# EAGLE board SparkFun_Pi_AVR_Programmer_HAT-Panel_v22 (EAGLE 7.7.0), part 1 of 2
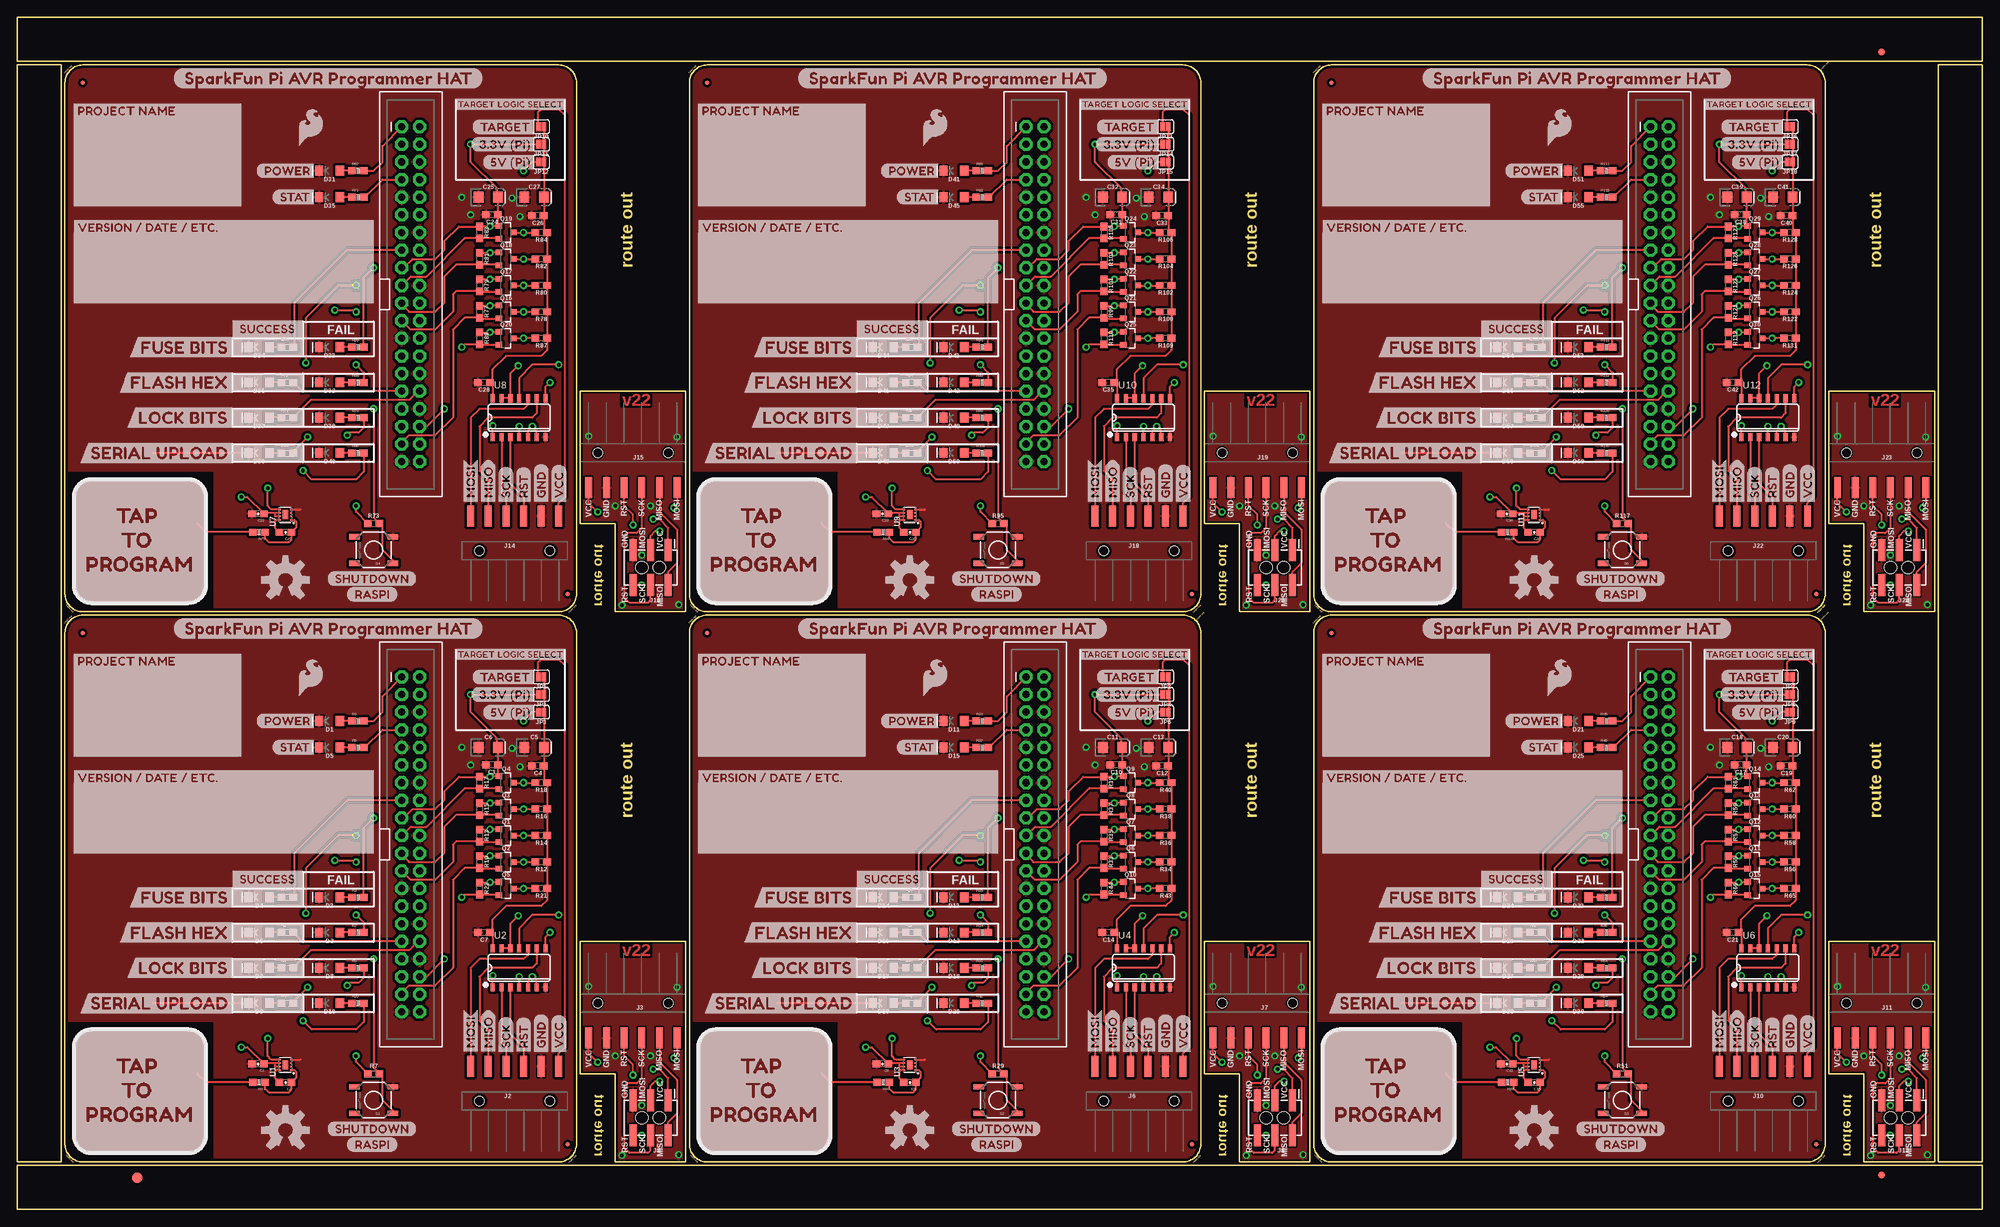
[diagram p0: board, top side]
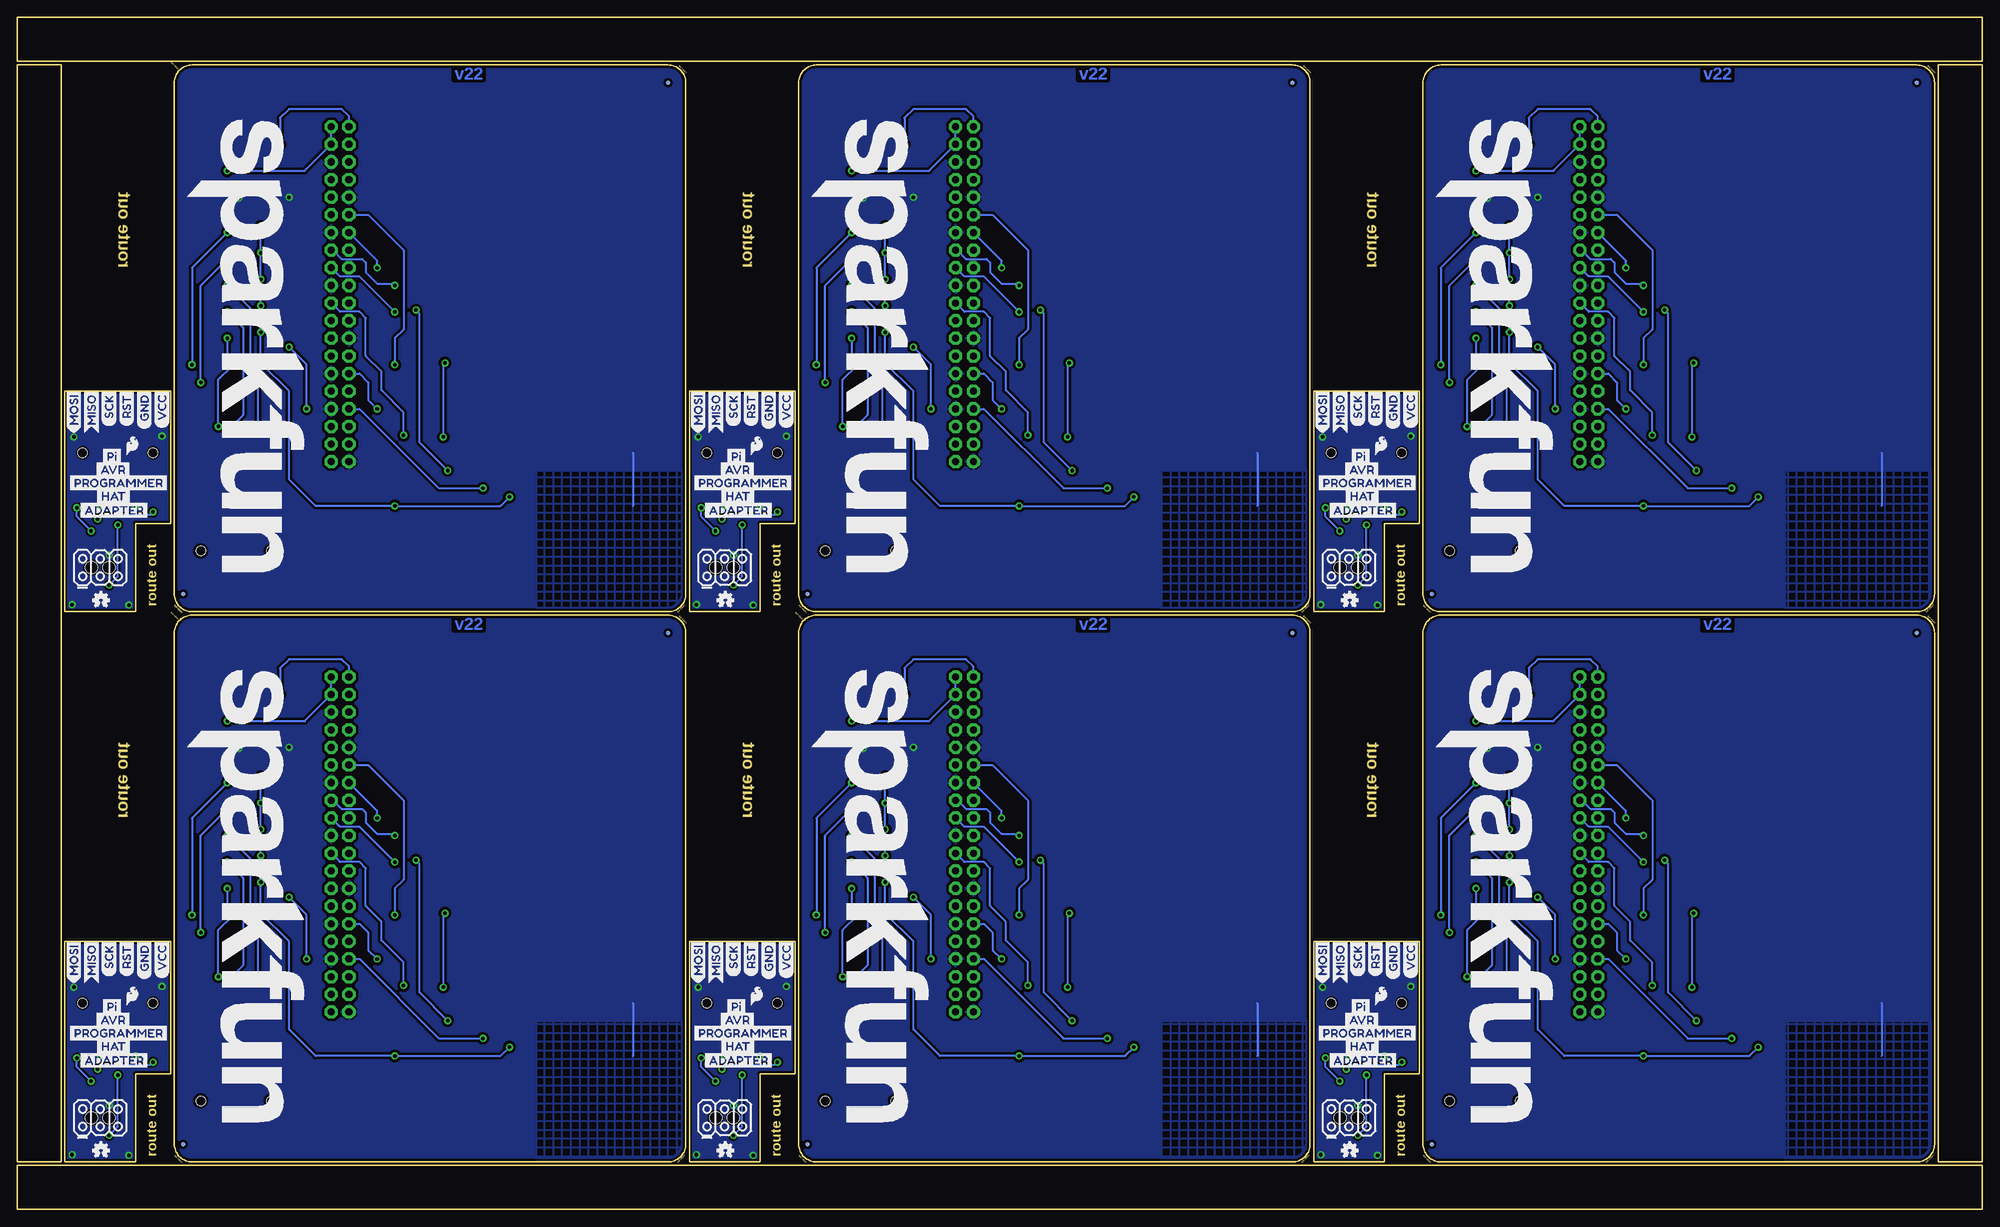
[diagram p1: board, bottom side, seen from below]

Size 282.96 x 171.7 mm. Coordinates in mm from the lower left corner, seen from the top.
Outline: 6.35,79.25 6.35,6.86 0,6.86 0,29.72
Outline: 0,27.18 0,164.85 6.35,164.85 6.35,76.71
Outline: 72.39,0 0,0 0,6.35 22.86,6.35
Outline: 20.32,6.35 282.96,6.35 282.96,0 69.85,0
Outline: 276.61,59.69 276.61,164.85 282.96,164.85 282.96,109.22
Outline: 282.96,111.76 282.96,6.86 276.61,6.86 276.61,62.23
Outline: 210.57,171.7 282.96,171.7 282.96,165.35 260.1,165.35
Outline: 262.64,165.35 0,165.35 0,171.7 213.11,171.7
Outline: 80.52,83.06 arc90 77.98,85.6 9.4,85.6 arc90 6.86,83.06 6.86,9.4 arc90 9.4,6.86 77.98,6.86 arc90 80.52,9.4 80.52,83.06
Outline: 86.11,6.86 96.27,6.86 96.27,38.61 81.03,38.61 81.03,19.56 86.11,19.56 86.11,6.86
Outline: 170.43,83.06 arc90 167.89,85.6 99.31,85.6 arc90 96.77,83.06 96.77,9.4 arc90 99.31,6.86 167.89,6.86 arc90 170.43,9.4 170.43,83.06
Outline: 176.02,6.86 186.18,6.86 186.18,38.61 170.94,38.61 170.94,19.56 176.02,19.56 176.02,6.86
Outline: 260.35,83.06 arc90 257.81,85.6 189.23,85.6 arc90 186.69,83.06 186.69,9.4 arc90 189.23,6.86 257.81,6.86 arc90 260.35,9.4 260.35,83.06
Outline: 265.94,6.86 276.1,6.86 276.1,38.61 260.86,38.61 260.86,19.56 265.94,19.56 265.94,6.86
Outline: 80.52,162.31 arc90 77.98,164.85 9.4,164.85 arc90 6.86,162.31 6.86,88.65 arc90 9.4,86.11 77.98,86.11 arc90 80.52,88.65 80.52,162.31
Outline: 86.11,86.11 96.27,86.11 96.27,117.86 81.03,117.86 81.03,98.81 86.11,98.81 86.11,86.11
Outline: 170.43,162.31 arc90 167.89,164.85 99.31,164.85 arc90 96.77,162.31 96.77,88.65 arc90 99.31,86.11 167.89,86.11 arc90 170.43,88.65 170.43,162.31
Outline: 176.02,86.11 186.18,86.11 186.18,117.86 170.94,117.86 170.94,98.81 176.02,98.81 176.02,86.11
Outline: 260.35,162.31 arc90 257.81,164.85 189.23,164.85 arc90 186.69,162.31 186.69,88.65 arc90 189.23,86.11 257.81,86.11 arc90 260.35,88.65 260.35,162.31
Outline: 265.94,86.11 276.1,86.11 276.1,117.86 260.86,117.86 260.86,98.81 265.94,98.81 265.94,86.11
Copper layers (1*16): Top 0.035mm / dielectric 1.5mm / Bottom 0.035mm
Design rules "SparkFun-2-layer *": minimum track width 10mil, minimum drill 20mil, track to track 8mil, track to pad 8mil, pad to pad 8mil, via to via 8mil, smd to smd 8mil, copper to edge 8mil, drill to drill 8mil, minimum pad ring 12mil, minimum via ring 10mil, stop-mask expansion 4mil, vias tented up to drill 20mil, thermal gap 10mil
Net classes: 3 VCC: width 0.381 mm, drill 0.508 mm, clearance 0.254 mm to class 0

## Footprints (pad centres in the part's own frame; a part is rotated, then mirrored left to right if it is on the bottom)
0603-CAP = smd 1.1 x 1: 1 -0.85,0; 2 0.85,0
0603 = smd 1.1 x 1: 1 -0.85,0; 2 0.85,0
EIA3216 = smd 1.4 x 1.6: + 1.4,0; - -1.4,0
LED-1206 = smd 1.2 x 1.4: A -1.5,0; C 1.5,0
FIDUCIAL-1.5X3 = smd 1.5 x 1.5: 1 0,0
FIDUCIAL-1X2 = smd 1 x 1: 1 0,0
FIDUCIAL-MICRO = smd 0.635 x 0.635: 1 0,0
2X20-SHROUDED = drill 1.016 pad 1.88 octagon: 1 -1.27,24.13; 2 1.27,24.13; 3 -1.27,21.59; 4 1.27,21.59; 5 -1.27,19.05; 6 1.27,19.05; 7 -1.27,16.51; 8 1.27,16.51; 9 -1.27,13.97; 10 1.27,13.97; 11 -1.27,11.43; 12 1.27,11.43; 13 -1.27,8.89; 14 1.27,8.89; 15 -1.27,6.35; 16 1.27,6.35; 17 -1.27,3.81; 18 1.27,3.81; 19 -1.27,1.27; 20 1.27,1.27; 21 -1.27,-1.27; 22 1.27,-1.27; 23 -1.27,-3.81; 24 1.27,-3.81; 25 -1.27,-6.35; 26 1.27,-6.35; 27 -1.27,-8.89; 28 1.27,-8.89; 29 -1.27,-11.43; 30 1.27,-11.43; 31 -1.27,-13.97; 32 1.27,-13.97; 33 -1.27,-16.51; 34 1.27,-16.51; 35 -1.27,-19.05; 36 1.27,-19.05; 37 -1.27,-21.59; 38 1.27,-21.59; 39 -1.27,-24.13; 40 1.27,-24.13
1X06-SMD_RA_MALE = smd 1 x 3: 1 -6.35,5; 2 -3.81,5; 3 -1.27,5; 4 1.27,5; 5 3.81,5; 6 6.35,5 | hole 1.4: -5.08,0; 5.08,0
2X3_SMT_POSTS = smd 1 x 3.17: 1 -2.54,-2.54; 2 -2.54,2.54; 3 0,-2.54; 4 0,2.54; 5 2.54,-2.54; 6 2.54,2.54 | hole 1.8: -1.27,0; 1.27,0
SMT-JUMPER_2_NO_SILK = smd 0.635 x 1.27: 1 -0.406,0; 2 0.406,0
SMT-JUMPER_2_NC_PASTE_SILK = smd 0.635 x 1.27: 1 -0.406,0; 2 0.406,0
SOT23-3 = smd 0.8 x 0.9: 1 -0.95,-1; 2 0.95,-1; 3 0,1.1
0603-RES = smd 1.1 x 1: 1 -0.85,0; 2 0.85,0
TACTILE-SWITCH-SMD = smd 1.524 x 0.762: 1 -2.794,1.905; 2 2.794,1.905; 3 -2.794,-1.905; 4 2.794,-1.905
UDFN/USON_8_PAD = smd 0.25 x 0.3: 1 -0.75,-0.852; 2 -0.25,-0.852; 3 0.25,-0.852; 4 0.75,-0.852; 5 0.75,0.852; 6 0.25,0.852; 7 -0.25,0.852; 8 -0.75,0.852 | smd 1.3 x 0.8: P$1 0,0
SO14 = smd 0.6 x 1.2: 1 -3.175,-2.8; 2 -1.905,-2.8; 3 -0.635,-2.8; 4 0.635,-2.8; 5 1.905,-2.8; 6 3.175,-2.8; 7 4.445,-2.8; 8 4.445,2.8; 9 3.175,2.8; 10 1.905,2.8; 11 0.635,2.8; 12 -0.635,2.8; 13 -1.905,2.8; 14 -3.175,2.8

## Placement (x,y rotation side)
C1  0.1uF  [0603-CAP]  34.67,20.95 180 top
C2  10nF  [0603-CAP]  38.61,18.29 180 top
C3  0.1uF  [0603]  68.33,64.01 180 top
C4  0.1uF  [0603]  74.93,63.88 180 top
C5  10uF  [EIA3216]  74.42,66.55 0 top
C6  10uF  [EIA3216]  67.82,66.55 0 top
C7  0.1uF  [0603]  67.18,39.88 180 top
C8  0.1uF  [0603-CAP]  124.59,20.95 180 top
C9  10nF  [0603-CAP]  128.52,18.29 180 top
C10  0.1uF  [0603]  158.24,64.01 180 top
C11  10uF  [EIA3216]  157.73,66.55 0 top
C12  0.1uF  [0603]  164.85,63.88 180 top
C13  10uF  [EIA3216]  164.34,66.55 0 top
C14  0.1uF  [0603]  157.1,39.88 180 top
C15  0.1uF  [0603-CAP]  214.5,20.95 180 top
C16  10nF  [0603-CAP]  218.44,18.29 180 top
C17  0.1uF  [0603]  248.16,64.01 180 top
C18  10uF  [EIA3216]  247.65,66.55 0 top
C19  0.1uF  [0603]  254.76,63.88 180 top
C20  10uF  [EIA3216]  254.25,66.55 0 top
C21  0.1uF  [0603]  247.01,39.88 180 top
C22  0.1uF  [0603-CAP]  34.67,100.2 180 top
C23  10nF  [0603-CAP]  38.61,97.54 180 top
C24  0.1uF  [0603]  68.33,143.26 180 top
C25  10uF  [EIA3216]  67.82,145.8 0 top
C26  0.1uF  [0603]  74.93,143.13 180 top
C27  10uF  [EIA3216]  74.42,145.8 0 top
C28  0.1uF  [0603]  67.18,119.13 180 top
C29  0.1uF  [0603-CAP]  124.59,100.2 180 top
C30  10nF  [0603-CAP]  128.52,97.54 180 top
C31  0.1uF  [0603]  158.24,143.26 180 top
C32  10uF  [EIA3216]  157.73,145.8 0 top
C33  0.1uF  [0603]  164.85,143.13 180 top
C34  10uF  [EIA3216]  164.34,145.8 0 top
C35  0.1uF  [0603]  157.1,119.13 180 top
C36  0.1uF  [0603-CAP]  214.5,100.2 180 top
C37  10nF  [0603-CAP]  218.44,97.54 180 top
C38  0.1uF  [0603]  248.16,143.26 180 top
C39  10uF  [EIA3216]  247.65,145.8 0 top
C40  0.1uF  [0603]  254.76,143.13 180 top
C41  10uF  [EIA3216]  254.25,145.8 0 top
C42  0.1uF  [0603]  247.01,119.13 180 top
D1  GREEN  [LED-1206]  44.96,70.36 180 top
D2  RED  [LED-1206]  44.96,39.88 180 top
D3  RED  [LED-1206]  44.96,44.96 180 top
D4  GREEN  [LED-1206]  34.8,44.96 180 top
D5  GREEN  [LED-1206]  44.96,66.55 180 top
D6  GREEN  [LED-1206]  34.8,39.88 180 top
D7  GREEN  [LED-1206]  34.8,34.8 180 top
D8  RED  [LED-1206]  44.96,34.8 180 top
D9  GREEN  [LED-1206]  34.8,29.72 180 top
D10  RED  [LED-1206]  44.96,29.72 180 top
D11  GREEN  [LED-1206]  134.87,70.36 180 top
D12  RED  [LED-1206]  134.87,39.88 180 top
D13  RED  [LED-1206]  134.87,44.96 180 top
D14  GREEN  [LED-1206]  124.71,44.96 180 top
D15  GREEN  [LED-1206]  134.87,66.55 180 top
D16  GREEN  [LED-1206]  124.71,39.88 180 top
D17  GREEN  [LED-1206]  124.71,34.8 180 top
D18  RED  [LED-1206]  134.87,34.8 180 top
D19  GREEN  [LED-1206]  124.71,29.72 180 top
D20  RED  [LED-1206]  134.87,29.72 180 top
D21  GREEN  [LED-1206]  224.79,70.36 180 top
D22  RED  [LED-1206]  224.79,39.88 180 top
D23  RED  [LED-1206]  224.79,44.96 180 top
D24  GREEN  [LED-1206]  214.63,44.96 180 top
D25  GREEN  [LED-1206]  224.79,66.55 180 top
D26  GREEN  [LED-1206]  214.63,39.88 180 top
D27  GREEN  [LED-1206]  214.63,34.8 180 top
D28  RED  [LED-1206]  224.79,34.8 180 top
D29  GREEN  [LED-1206]  214.63,29.72 180 top
D30  RED  [LED-1206]  224.79,29.72 180 top
D31  GREEN  [LED-1206]  44.96,149.61 180 top
D32  RED  [LED-1206]  44.96,119.13 180 top
D33  RED  [LED-1206]  44.96,124.21 180 top
D34  GREEN  [LED-1206]  34.8,124.21 180 top
D35  GREEN  [LED-1206]  44.96,145.8 180 top
D36  GREEN  [LED-1206]  34.8,119.13 180 top
D37  GREEN  [LED-1206]  34.8,114.05 180 top
D38  RED  [LED-1206]  44.96,114.05 180 top
D39  GREEN  [LED-1206]  34.8,108.97 180 top
D40  RED  [LED-1206]  44.96,108.97 180 top
D41  GREEN  [LED-1206]  134.87,149.61 180 top
D42  RED  [LED-1206]  134.87,119.13 180 top
D43  RED  [LED-1206]  134.87,124.21 180 top
D44  GREEN  [LED-1206]  124.71,124.21 180 top
D45  GREEN  [LED-1206]  134.87,145.8 180 top
D46  GREEN  [LED-1206]  124.71,119.13 180 top
D47  GREEN  [LED-1206]  124.71,114.05 180 top
D48  RED  [LED-1206]  134.87,114.05 180 top
D49  GREEN  [LED-1206]  124.71,108.97 180 top
D50  RED  [LED-1206]  134.87,108.97 180 top
D51  GREEN  [LED-1206]  224.79,149.61 180 top
D52  RED  [LED-1206]  224.79,119.13 180 top
D53  RED  [LED-1206]  224.79,124.21 180 top
D54  GREEN  [LED-1206]  214.63,124.21 180 top
D55  GREEN  [LED-1206]  224.79,145.8 180 top
D56  GREEN  [LED-1206]  214.63,119.13 180 top
D57  GREEN  [LED-1206]  214.63,114.05 180 top
D58  RED  [LED-1206]  224.79,114.05 180 top
D59  GREEN  [LED-1206]  214.63,108.97 180 top
D60  RED  [LED-1206]  224.79,108.97 180 top
E$1  [FIDUCIAL-1.5X3]  17.27,4.57 0 top
E$5  [FIDUCIAL-1X2]  268.48,166.75 270 top
E$6  [FIDUCIAL-1X2]  268.48,4.95 90 top
FD1  FIDUCIALUFIDUCIAL  [FIDUCIAL-MICRO]  9.4,83.06 0 top
FD2  FIDUCIALUFIDUCIAL  [FIDUCIAL-MICRO]  79.25,9.4 0 top
FD3  FIDUCIALUFIDUCIAL  [FIDUCIAL-MICRO]  79.25,9.4 0 bottom
FD4  FIDUCIALUFIDUCIAL  [FIDUCIAL-MICRO]  9.4,83.06 0 bottom
FD5  FIDUCIALUFIDUCIAL  [FIDUCIAL-MICRO]  99.31,83.06 0 top
FD6  FIDUCIALUFIDUCIAL  [FIDUCIAL-MICRO]  169.16,9.4 0 top
FD7  FIDUCIALUFIDUCIAL  [FIDUCIAL-MICRO]  169.16,9.4 0 bottom
FD8  FIDUCIALUFIDUCIAL  [FIDUCIAL-MICRO]  99.31,83.06 0 bottom
FD9  FIDUCIALUFIDUCIAL  [FIDUCIAL-MICRO]  189.23,83.06 0 top
FD10  FIDUCIALUFIDUCIAL  [FIDUCIAL-MICRO]  259.08,9.4 0 top
FD11  FIDUCIALUFIDUCIAL  [FIDUCIAL-MICRO]  259.08,9.4 0 bottom
FD12  FIDUCIALUFIDUCIAL  [FIDUCIAL-MICRO]  189.23,83.06 0 bottom
FD13  FIDUCIALUFIDUCIAL  [FIDUCIAL-MICRO]  9.4,162.31 0 top
FD14  FIDUCIALUFIDUCIAL  [FIDUCIAL-MICRO]  79.25,88.65 0 top
FD15  FIDUCIALUFIDUCIAL  [FIDUCIAL-MICRO]  79.25,88.65 0 bottom
FD16  FIDUCIALUFIDUCIAL  [FIDUCIAL-MICRO]  9.4,162.31 0 bottom
FD17  FIDUCIALUFIDUCIAL  [FIDUCIAL-MICRO]  99.31,162.31 0 top
FD18  FIDUCIALUFIDUCIAL  [FIDUCIAL-MICRO]  169.16,88.65 0 top
FD19  FIDUCIALUFIDUCIAL  [FIDUCIAL-MICRO]  169.16,88.65 0 bottom
FD20  FIDUCIALUFIDUCIAL  [FIDUCIAL-MICRO]  99.31,162.31 0 bottom
FD21  FIDUCIALUFIDUCIAL  [FIDUCIAL-MICRO]  189.23,162.31 0 top
FD22  FIDUCIALUFIDUCIAL  [FIDUCIAL-MICRO]  259.08,88.65 0 top
FD23  FIDUCIALUFIDUCIAL  [FIDUCIAL-MICRO]  259.08,88.65 0 bottom
FD24  FIDUCIALUFIDUCIAL  [FIDUCIAL-MICRO]  189.23,162.31 0 bottom
J1  RASPBERRYPI-B+-GPIO  [2X20-SHROUDED]  56.64,52.58 0 top
J2  SPI  [1X06-SMD_RA_MALE]  71.63,15.62 0 top
J3  CABLE  [1X06-SMD_RA_MALE]  88.65,29.72 180 top
J4  AVR 3X2 TARGET  [2X3_SMT_POSTS]  91.19,13.21 180 top
J5  RASPBERRYPI-B+-GPIO  [2X20-SHROUDED]  146.56,52.58 0 top
J6  SPI  [1X06-SMD_RA_MALE]  161.54,15.62 0 top
J7  CABLE  [1X06-SMD_RA_MALE]  178.56,29.72 180 top
J8  AVR 3X2 TARGET  [2X3_SMT_POSTS]  181.1,13.21 180 top
J9  RASPBERRYPI-B+-GPIO  [2X20-SHROUDED]  236.47,52.58 0 top
J10  SPI  [1X06-SMD_RA_MALE]  251.46,15.62 0 top
J11  CABLE  [1X06-SMD_RA_MALE]  268.48,29.72 180 top
J12  AVR 3X2 TARGET  [2X3_SMT_POSTS]  271.02,13.21 180 top
J13  RASPBERRYPI-B+-GPIO  [2X20-SHROUDED]  56.64,131.83 0 top
J14  SPI  [1X06-SMD_RA_MALE]  71.63,94.87 0 top
J15  CABLE  [1X06-SMD_RA_MALE]  88.65,108.97 180 top
J16  AVR 3X2 TARGET  [2X3_SMT_POSTS]  91.19,92.46 180 top
J17  RASPBERRYPI-B+-GPIO  [2X20-SHROUDED]  146.56,131.83 0 top
J18  SPI  [1X06-SMD_RA_MALE]  161.54,94.87 0 top
J19  CABLE  [1X06-SMD_RA_MALE]  178.56,108.97 180 top
J20  AVR 3X2 TARGET  [2X3_SMT_POSTS]  181.1,92.46 180 top
J21  RASPBERRYPI-B+-GPIO  [2X20-SHROUDED]  236.47,131.83 0 top
J22  SPI  [1X06-SMD_RA_MALE]  251.46,94.87 0 top
J23  CABLE  [1X06-SMD_RA_MALE]  268.48,108.97 180 top
J24  AVR 3X2 TARGET  [2X3_SMT_POSTS]  271.02,92.46 180 top
JP1  [SMT-JUMPER_2_NO_SILK]  75.44,74.17 180 top
JP2  [SMT-JUMPER_2_NC_PASTE_SILK]  165.35,76.71 180 top
JP3  [SMT-JUMPER_2_NO_SILK]  75.44,71.63 180 top
JP4  [SMT-JUMPER_2_NO_SILK]  165.35,74.17 180 top
JP5  [SMT-JUMPER_2_NC_PASTE_SILK]  75.44,76.71 180 top
JP6  [SMT-JUMPER_2_NO_SILK]  165.35,71.63 180 top
JP7  [SMT-JUMPER_2_NC_PASTE_SILK]  255.27,76.71 180 top
JP8  [SMT-JUMPER_2_NO_SILK]  255.27,74.17 180 top
JP9  [SMT-JUMPER_2_NO_SILK]  255.27,71.63 180 top
JP10  [SMT-JUMPER_2_NC_PASTE_SILK]  75.44,155.96 180 top
JP11  [SMT-JUMPER_2_NO_SILK]  75.44,153.42 180 top
JP12  [SMT-JUMPER_2_NO_SILK]  75.44,150.88 180 top
JP13  [SMT-JUMPER_2_NC_PASTE_SILK]  165.35,155.96 180 top
JP14  [SMT-JUMPER_2_NO_SILK]  165.35,153.42 180 top
JP15  [SMT-JUMPER_2_NO_SILK]  165.35,150.88 180 top
JP16  [SMT-JUMPER_2_NC_PASTE_SILK]  255.27,155.96 180 top
JP17  [SMT-JUMPER_2_NO_SILK]  255.27,153.42 180 top
JP18  [SMT-JUMPER_2_NO_SILK]  255.27,150.88 180 top
LOGO1  SFE_LOGO_FLAME.2_INCH  [SFE_LOGO_FLAME_.2]  40.26,73.79 0 top
LOGO2  OSHW-LOGOL  [OSHW-LOGO-L]  38.61,11.43 0 top
LOGO3  SFE_LOGO_NAME.6_INCH  [SFE_LOGO_NAME_.6]  78.61,77.72 270 bottom
LOGO4  SFE_LOGO_FLAME.1_INCH  [SFE_LOGO_FLAME_.1]  87.71,29.13 0 bottom
LOGO5  OSHW-LOGOMINI  [OSHW-LOGO-MINI]  91.08,8.51 0 bottom
LOGO6  OSHW-LOGOL  [OSHW-LOGO-L]  128.52,11.43 0 top
LOGO7  SFE_LOGO_FLAME.2_INCH  [SFE_LOGO_FLAME_.2]  130.18,73.79 0 top
LOGO8  SFE_LOGO_NAME.6_INCH  [SFE_LOGO_NAME_.6]  168.53,77.72 270 bottom
LOGO9  SFE_LOGO_FLAME.1_INCH  [SFE_LOGO_FLAME_.1]  177.62,29.13 0 bottom
LOGO10  OSHW-LOGOMINI  [OSHW-LOGO-MINI]  181,8.51 0 bottom
LOGO11  OSHW-LOGOL  [OSHW-LOGO-L]  218.44,11.43 0 top
LOGO12  SFE_LOGO_FLAME.2_INCH  [SFE_LOGO_FLAME_.2]  220.09,73.79 0 top
LOGO13  SFE_LOGO_NAME.6_INCH  [SFE_LOGO_NAME_.6]  258.44,77.72 270 bottom
LOGO14  SFE_LOGO_FLAME.1_INCH  [SFE_LOGO_FLAME_.1]  267.54,29.13 0 bottom
LOGO15  OSHW-LOGOMINI  [OSHW-LOGO-MINI]  270.92,8.51 0 bottom
LOGO16  OSHW-LOGOL  [OSHW-LOGO-L]  38.61,90.68 0 top
LOGO17  SFE_LOGO_FLAME.2_INCH  [SFE_LOGO_FLAME_.2]  40.26,153.03 0 top
LOGO18  SFE_LOGO_NAME.6_INCH  [SFE_LOGO_NAME_.6]  78.61,156.97 270 bottom
LOGO19  SFE_LOGO_FLAME.1_INCH  [SFE_LOGO_FLAME_.1]  87.71,108.38 0 bottom
LOGO20  OSHW-LOGOMINI  [OSHW-LOGO-MINI]  91.08,87.76 0 bottom
LOGO21  OSHW-LOGOL  [OSHW-LOGO-L]  128.52,90.68 0 top
LOGO22  SFE_LOGO_FLAME.2_INCH  [SFE_LOGO_FLAME_.2]  130.18,153.03 0 top
LOGO23  SFE_LOGO_NAME.6_INCH  [SFE_LOGO_NAME_.6]  168.53,156.97 270 bottom
LOGO24  SFE_LOGO_FLAME.1_INCH  [SFE_LOGO_FLAME_.1]  177.62,108.38 0 bottom
LOGO25  OSHW-LOGOMINI  [OSHW-LOGO-MINI]  181,87.76 0 bottom
LOGO26  OSHW-LOGOL  [OSHW-LOGO-L]  218.44,90.68 0 top
LOGO27  SFE_LOGO_FLAME.2_INCH  [SFE_LOGO_FLAME_.2]  220.09,153.03 0 top
LOGO28  SFE_LOGO_NAME.6_INCH  [SFE_LOGO_NAME_.6]  258.44,156.97 270 bottom
LOGO29  SFE_LOGO_FLAME.1_INCH  [SFE_LOGO_FLAME_.1]  267.54,108.38 0 bottom
LOGO30  OSHW-LOGOMINI  [OSHW-LOGO-MINI]  270.92,87.76 0 bottom
Q1  220mA/50V/3.5Ω  [SOT23-3]  70.36,53.85 270 top
Q2  220mA/50V/3.5Ω  [SOT23-3]  70.36,50.04 270 top
Q3  220mA/50V/3.5Ω  [SOT23-3]  70.36,57.66 270 top
Q4  220mA/50V/3.5Ω  [SOT23-3]  70.36,61.47 270 top
Q5  220mA/50V/3.5Ω  [SOT23-3]  70.36,46.23 270 top
Q6  220mA/50V/3.5Ω  [SOT23-3]  160.27,50.04 270 top
Q7  220mA/50V/3.5Ω  [SOT23-3]  160.27,53.85 270 top
Q8  220mA/50V/3.5Ω  [SOT23-3]  160.27,57.66 270 top
Q9  220mA/50V/3.5Ω  [SOT23-3]  160.27,61.47 270 top
Q10  220mA/50V/3.5Ω  [SOT23-3]  160.27,46.23 270 top
Q11  220mA/50V/3.5Ω  [SOT23-3]  250.19,50.04 270 top
Q12  220mA/50V/3.5Ω  [SOT23-3]  250.19,53.85 270 top
Q13  220mA/50V/3.5Ω  [SOT23-3]  250.19,57.66 270 top
Q14  220mA/50V/3.5Ω  [SOT23-3]  250.19,61.47 270 top
Q15  220mA/50V/3.5Ω  [SOT23-3]  250.19,46.23 270 top
Q16  220mA/50V/3.5Ω  [SOT23-3]  70.36,129.29 270 top
Q17  220mA/50V/3.5Ω  [SOT23-3]  70.36,133.1 270 top
Q18  220mA/50V/3.5Ω  [SOT23-3]  70.36,136.91 270 top
Q19  220mA/50V/3.5Ω  [SOT23-3]  70.36,140.72 270 top
Q20  220mA/50V/3.5Ω  [SOT23-3]  70.36,125.48 270 top
Q21  220mA/50V/3.5Ω  [SOT23-3]  160.27,129.29 270 top
Q22  220mA/50V/3.5Ω  [SOT23-3]  160.27,133.1 270 top
Q23  220mA/50V/3.5Ω  [SOT23-3]  160.27,136.91 270 top
Q24  220mA/50V/3.5Ω  [SOT23-3]  160.27,140.72 270 top
Q25  220mA/50V/3.5Ω  [SOT23-3]  160.27,125.48 270 top
Q26  220mA/50V/3.5Ω  [SOT23-3]  250.19,129.29 270 top
Q27  220mA/50V/3.5Ω  [SOT23-3]  250.19,133.1 270 top
Q28  220mA/50V/3.5Ω  [SOT23-3]  250.19,136.91 270 top
Q29  220mA/50V/3.5Ω  [SOT23-3]  250.19,140.72 270 top
Q30  220mA/50V/3.5Ω  [SOT23-3]  250.19,125.48 270 top
R1  1K  [0603-RES]  49.02,70.36 0 top
R2  1K  [0603-RES]  49.02,39.88 0 top
R3  1K  [0603-RES]  49.02,44.96 0 top
R4  1K  [0603-RES]  38.86,44.96 0 top
R5  1K  [0603-RES]  49.02,66.55 0 top
R6  1K  [0603-RES]  38.86,39.88 0 top
R7  1k  [0603]  51.31,19.56 0 top
R8  1K  [0603-RES]  38.86,34.8 0 top
R9  1K  [0603-RES]  49.02,34.8 0 top
R10  10k  [0603]  66.55,50.04 270 top
R11  10k  [0603-RES]  34.8,18.29 180 top
R12  10k  [0603]  75.44,50.04 180 top
R13  10k  [0603]  66.55,53.85 270 top
R14  10k  [0603]  75.44,53.85 180 top
R15  10k  [0603]  66.55,57.66 270 top
R16  10k  [0603]  75.44,57.66 180 top
R17  10k  [0603]  66.55,61.47 270 top
R18  10k  [0603]  75.44,61.47 180 top
R19  1K  [0603-RES]  38.86,29.72 0 top
R20  1K  [0603-RES]  49.02,29.72 0 top
R21  10k  [0603]  75.44,46.23 180 top
R22  10k  [0603]  66.55,46.23 270 top
R23  1K  [0603-RES]  138.94,70.36 0 top
R24  1K  [0603-RES]  138.94,39.88 0 top
R25  1K  [0603-RES]  138.94,44.96 0 top
R26  1K  [0603-RES]  128.78,44.96 0 top
R27  1K  [0603-RES]  138.94,66.55 0 top
R28  1K  [0603-RES]  128.78,39.88 0 top
R29  1k  [0603]  141.22,19.56 0 top
R30  1K  [0603-RES]  128.78,34.8 0 top
R31  10k  [0603-RES]  124.71,18.29 180 top
R32  1K  [0603-RES]  138.94,34.8 0 top
R33  10k  [0603]  156.46,50.04 270 top
R34  10k  [0603]  165.35,50.04 180 top
R35  10k  [0603]  156.46,53.85 270 top
R36  10k  [0603]  165.35,53.85 180 top
R37  10k  [0603]  156.46,57.66 270 top
R38  10k  [0603]  165.35,57.66 180 top
R39  10k  [0603]  156.46,61.47 270 top
R40  10k  [0603]  165.35,61.47 180 top
R41  1K  [0603-RES]  128.78,29.72 0 top
R42  1K  [0603-RES]  138.94,29.72 0 top
R43  10k  [0603]  165.35,46.23 180 top
R44  10k  [0603]  156.46,46.23 270 top
R45  1K  [0603-RES]  228.85,70.36 0 top
R46  1K  [0603-RES]  228.85,39.88 0 top
R47  1K  [0603-RES]  228.85,44.96 0 top
R48  1K  [0603-RES]  218.69,44.96 0 top
R49  1K  [0603-RES]  228.85,66.55 0 top
R50  1K  [0603-RES]  218.69,39.88 0 top
R51  1k  [0603]  231.14,19.56 0 top
R52  1K  [0603-RES]  218.69,34.8 0 top
R53  10k  [0603-RES]  214.63,18.29 180 top
R54  1K  [0603-RES]  228.85,34.8 0 top
R55  10k  [0603]  246.38,50.04 270 top
R56  10k  [0603]  255.27,50.04 180 top
R57  10k  [0603]  246.38,53.85 270 top
R58  10k  [0603]  255.27,53.85 180 top
R59  10k  [0603]  246.38,57.66 270 top
R60  10k  [0603]  255.27,57.66 180 top
R61  10k  [0603]  246.38,61.47 270 top
R62  10k  [0603]  255.27,61.47 180 top
R63  1K  [0603-RES]  218.69,29.72 0 top
R64  1K  [0603-RES]  228.85,29.72 0 top
R65  10k  [0603]  255.27,46.23 180 top
R66  10k  [0603]  246.38,46.23 270 top
R67  1K  [0603-RES]  49.02,149.61 0 top
R68  1K  [0603-RES]  49.02,119.13 0 top
R69  1K  [0603-RES]  49.02,124.21 0 top
R70  1K  [0603-RES]  38.86,124.21 0 top
R71  1K  [0603-RES]  49.02,145.8 0 top
R72  1K  [0603-RES]  38.86,119.13 0 top
R73  1k  [0603]  51.31,98.81 0 top
R74  1K  [0603-RES]  38.86,114.05 0 top
R75  10k  [0603-RES]  34.8,97.54 180 top
R76  1K  [0603-RES]  49.02,114.05 0 top
R77  10k  [0603]  66.55,129.29 270 top
R78  10k  [0603]  75.44,129.29 180 top
R79  10k  [0603]  66.55,133.1 270 top
R80  10k  [0603]  75.44,133.1 180 top
R81  10k  [0603]  66.55,136.91 270 top
R82  10k  [0603]  75.44,136.91 180 top
R83  10k  [0603]  66.55,140.72 270 top
R84  10k  [0603]  75.44,140.72 180 top
R85  1K  [0603-RES]  38.86,108.97 0 top
R86  1K  [0603-RES]  49.02,108.97 0 top
R87  10k  [0603]  75.44,125.48 180 top
R88  10k  [0603]  66.55,125.48 270 top
R89  1K  [0603-RES]  138.94,149.61 0 top
R90  1K  [0603-RES]  138.94,119.13 0 top
R91  1K  [0603-RES]  138.94,124.21 0 top
R92  1K  [0603-RES]  128.78,124.21 0 top
R93  1K  [0603-RES]  138.94,145.8 0 top
R94  1K  [0603-RES]  128.78,119.13 0 top
R95  1k  [0603]  141.22,98.81 0 top
R96  1K  [0603-RES]  128.78,114.05 0 top
R97  10k  [0603-RES]  124.71,97.54 180 top
R98  1K  [0603-RES]  138.94,114.05 0 top
R99  10k  [0603]  156.46,129.29 270 top
R100  10k  [0603]  165.35,129.29 180 top
R101  10k  [0603]  156.46,133.1 270 top
R102  10k  [0603]  165.35,133.1 180 top
R103  10k  [0603]  156.46,136.91 270 top
R104  10k  [0603]  165.35,136.91 180 top
R105  10k  [0603]  156.46,140.72 270 top
R106  10k  [0603]  165.35,140.72 180 top
R107  1K  [0603-RES]  128.78,108.97 0 top
R108  1K  [0603-RES]  138.94,108.97 0 top
R109  10k  [0603]  165.35,125.48 180 top
R110  10k  [0603]  156.46,125.48 270 top
R111  1K  [0603-RES]  228.85,149.61 0 top
R112  1K  [0603-RES]  228.85,119.13 0 top
R113  1K  [0603-RES]  228.85,124.21 0 top
R114  1K  [0603-RES]  218.69,124.21 0 top
R115  1K  [0603-RES]  228.85,145.8 0 top
R116  1K  [0603-RES]  218.69,119.13 0 top
R117  1k  [0603]  231.14,98.81 0 top
R118  1K  [0603-RES]  218.69,114.05 0 top
R119  10k  [0603-RES]  214.63,97.54 180 top
R120  1K  [0603-RES]  228.85,114.05 0 top
R121  10k  [0603]  246.38,129.29 270 top
R122  10k  [0603]  255.27,129.29 180 top
R123  10k  [0603]  246.38,133.1 270 top
R124  10k  [0603]  255.27,133.1 180 top
R125  10k  [0603]  246.38,136.91 270 top
R126  10k  [0603]  255.27,136.91 180 top
R127  10k  [0603]  246.38,140.72 270 top
R128  10k  [0603]  255.27,140.72 180 top
R129  1K  [0603-RES]  218.69,108.97 0 top
R130  1K  [0603-RES]  228.85,108.97 0 top
R131  10k  [0603]  255.27,125.48 180 top
R132  10k  [0603]  246.38,125.48 270 top
S1  [TACTILE-SWITCH-SMD]  51.31,15.75 180 top
S2  [TACTILE-SWITCH-SMD]  141.22,15.75 180 top
S3  [TACTILE-SWITCH-SMD]  231.14,15.75 180 top
S4  [TACTILE-SWITCH-SMD]  51.31,95 180 top
S5  [TACTILE-SWITCH-SMD]  141.22,95 180 top
S6  [TACTILE-SWITCH-SMD]  231.14,95 180 top
U1  AT42QT1010 - UDFN  [UDFN/USON_8_PAD]  38.61,20.83 90 top
U2  74LVC4066  [SO14]  71.63,34.8 0 top
U3  AT42QT1010 - UDFN  [UDFN/USON_8_PAD]  128.52,20.83 90 top
U4  74LVC4066  [SO14]  161.54,34.8 0 top
U5  AT42QT1010 - UDFN  [UDFN/USON_8_PAD]  218.44,20.83 90 top
U6  74LVC4066  [SO14]  251.46,34.8 0 top
U7  AT42QT1010 - UDFN  [UDFN/USON_8_PAD]  38.61,100.08 90 top
U8  74LVC4066  [SO14]  71.63,114.05 0 top
U9  AT42QT1010 - UDFN  [UDFN/USON_8_PAD]  128.52,100.08 90 top
U10  74LVC4066  [SO14]  161.54,114.05 0 top
U11  AT42QT1010 - UDFN  [UDFN/USON_8_PAD]  218.44,100.08 90 top
U12  74LVC4066  [SO14]  251.46,114.05 0 top
U$1  [SPARKFUN_PI_AVR_PROGRAMMER_HAT0]  22.48,83.69 0 top
U$2  [PROJECT_NAME0]  7.49,78.99 0 top
U$3  [VERSION_#_DATE_#_ETC#0]  7.53,62.19 0 top
U$4  [TARGET_LOGIC_SELECT4]  62.54,79.95 0 top
U$5  [POWER0]  34.42,70.36 0 top
U$6  [STAT1]  36.65,66.57 0 top
U$7  [SHUTDOWN2]  44.58,11.61 0 top
U$8  [RASPI3]  47.42,9.35 0 top
U$9  [3#3V_#PI#7]  65.35,74.17 0 top
U$10  [5V_#PI#8]  66.98,71.6 0 top
U$11  [TARGET0]  65.46,76.68 0 top
U$12  [MISO1]  67.82,22.1 90 top
U$13  [MOSI0]  65.28,22.1 90 top
U$14  [SCK2]  70.36,22.1 90 top
U$15  [RST3]  72.9,22.1 90 top
U$16  [GND4]  75.44,22.1 90 top
U$17  [GND1]  84.84,33.15 90 bottom
U$18  [TAP0]  12.17,20.68 0 top
U$19  [TO1]  12.95,17.2 0 top
U$20  [PROGRAM2]  7.87,13.69 0 top
U$21  [VCC0]  77.98,22.1 90 top
U$22  [SUCCESS0]  30.86,47.57 0 top
U$23  [FUSE_BITS2]  16.13,44.93 0 top
U$24  [FLASH_HEX3]  14.66,39.88 0 top
U$25  [LOCK_BITS4]  15.77,34.8 0 top
U$26  [SERIAL_UPLOAD5]  8.99,29.72 0 top
U$27  [MISO5]  92.46,32.51 90 bottom
U$28  [MOSI4]  95,32.51 90 bottom
U$29  [RST2]  87.38,33.53 90 bottom
U$30  [SCK3]  89.92,33.53 90 bottom
U$31  [VCC0]  82.3,33.27 90 bottom
U$32  [PI0]  91.44,29.21 0 bottom
U$33  [AVR1]  92.33,27.3 0 bottom
U$34  [PROGRAMMER2]  96.14,25.4 0 bottom
U$35  [HAT3]  92.2,23.5 0 bottom
U$36  [ADAPTER4]  94.61,21.46 0 bottom
U$37  [SPARKFUN_PI_AVR_PROGRAMMER_HAT0]  112.39,83.69 0 top
U$38  [PROJECT_NAME0]  97.41,78.99 0 top
U$39  [VERSION_#_DATE_#_ETC#0]  97.44,62.19 0 top
U$40  [TARGET_LOGIC_SELECT4]  152.46,79.95 0 top
U$41  [POWER0]  124.33,70.36 0 top
U$42  [STAT1]  126.57,66.57 0 top
U$43  [SHUTDOWN2]  134.49,11.61 0 top
U$44  [RASPI3]  137.34,9.35 0 top
U$45  [3#3V_#PI#7]  155.27,74.17 0 top
U$46  [5V_#PI#8]  156.9,71.6 0 top
U$47  [TARGET0]  155.37,76.68 0 top
U$48  [MISO1]  157.73,22.1 90 top
U$49  [MOSI0]  155.19,22.1 90 top
U$50  [SCK2]  160.27,22.1 90 top
U$51  [RST3]  162.81,22.1 90 top
U$52  [GND4]  165.35,22.1 90 top
U$53  [TAP0]  102.08,20.68 0 top
U$54  [TO1]  102.87,17.2 0 top
U$55  [PROGRAM2]  97.79,13.69 0 top
U$56  [SUCCESS0]  120.78,47.57 0 top
U$57  [FUSE_BITS2]  106.05,44.93 0 top
U$58  [FLASH_HEX3]  104.57,39.88 0 top
U$59  [LOCK_BITS4]  105.69,34.8 0 top
U$60  [SERIAL_UPLOAD5]  98.91,29.72 0 top
U$61  [VCC0]  167.89,22.1 90 top
U$62  [GND1]  174.75,33.15 90 bottom
U$63  [MISO5]  182.37,32.51 90 bottom
U$64  [MOSI4]  184.91,32.51 90 bottom
U$65  [RST2]  177.29,33.53 90 bottom
U$66  [SCK3]  179.83,33.53 90 bottom
U$67  [VCC0]  172.21,33.27 90 bottom
U$68  [PI0]  181.36,29.21 0 bottom
U$69  [AVR1]  182.25,27.3 0 bottom
U$70  [PROGRAMMER2]  186.06,25.4 0 bottom
U$71  [HAT3]  182.12,23.5 0 bottom
U$72  [ADAPTER4]  184.53,21.46 0 bottom
U$73  [SPARKFUN_PI_AVR_PROGRAMMER_HAT0]  202.31,83.69 0 top
U$74  [PROJECT_NAME0]  187.32,78.99 0 top
U$75  [VERSION_#_DATE_#_ETC#0]  187.36,62.19 0 top
U$76  [TARGET_LOGIC_SELECT4]  242.38,79.95 0 top
U$77  [POWER0]  214.25,70.36 0 top
U$78  [STAT1]  216.48,66.57 0 top
U$79  [SHUTDOWN2]  224.41,11.61 0 top
U$80  [RASPI3]  227.25,9.35 0 top
U$81  [3#3V_#PI#7]  245.19,74.17 0 top
U$82  [5V_#PI#8]  246.81,71.6 0 top
U$83  [TARGET0]  245.29,76.68 0 top
U$84  [MISO1]  247.65,22.1 90 top
U$85  [MOSI0]  245.11,22.1 90 top
U$86  [SCK2]  250.19,22.1 90 top
U$87  [RST3]  252.73,22.1 90 top
U$88  [GND4]  255.27,22.1 90 top
U$89  [TAP0]  192,20.68 0 top
U$90  [TO1]  192.79,17.2 0 top
U$91  [PROGRAM2]  187.71,13.69 0 top
U$92  [SUCCESS0]  210.69,47.57 0 top
U$93  [FUSE_BITS2]  195.96,44.93 0 top
U$94  [FLASH_HEX3]  194.49,39.88 0 top
U$95  [LOCK_BITS4]  195.61,34.8 0 top
U$96  [SERIAL_UPLOAD5]  188.82,29.72 0 top
U$97  [VCC0]  257.81,22.1 90 top
U$98  [GND1]  264.67,33.15 90 bottom
U$99  [MISO5]  272.29,32.51 90 bottom
U$100  [MOSI4]  274.83,32.51 90 bottom
U$101  [RST2]  267.21,33.53 90 bottom
U$102  [SCK3]  269.75,33.53 90 bottom
U$103  [VCC0]  262.13,33.27 90 bottom
U$104  [PI0]  271.27,29.21 0 bottom
U$105  [AVR1]  272.16,27.3 0 bottom
U$106  [PROGRAMMER2]  275.97,25.4 0 bottom
U$107  [HAT3]  272.03,23.5 0 bottom
U$108  [ADAPTER4]  274.45,21.46 0 bottom
U$109  [SPARKFUN_PI_AVR_PROGRAMMER_HAT0]  22.48,162.94 0 top
U$110  [PROJECT_NAME0]  7.49,158.24 0 top
U$111  [VERSION_#_DATE_#_ETC#0]  7.53,141.44 0 top
U$112  [TARGET_LOGIC_SELECT4]  62.54,159.2 0 top
U$113  [POWER0]  34.42,149.61 0 top
U$114  [STAT1]  36.65,145.82 0 top
U$115  [SHUTDOWN2]  44.58,90.86 0 top
U$116  [RASPI3]  47.42,88.6 0 top
U$117  [3#3V_#PI#7]  65.35,153.42 0 top
U$118  [5V_#PI#8]  66.98,150.85 0 top
U$119  [TARGET0]  65.46,155.93 0 top
U$120  [MISO1]  67.82,101.35 90 top
U$121  [MOSI0]  65.28,101.35 90 top
U$122  [SCK2]  70.36,101.35 90 top
U$123  [RST3]  72.9,101.35 90 top
U$124  [GND4]  75.44,101.35 90 top
U$125  [TAP0]  12.17,99.92 0 top
U$126  [TO1]  12.95,96.44 0 top
U$127  [PROGRAM2]  7.87,92.94 0 top
U$128  [SUCCESS0]  30.86,126.82 0 top
U$129  [FUSE_BITS2]  16.13,124.18 0 top
U$130  [FLASH_HEX3]  14.66,119.13 0 top
U$131  [LOCK_BITS4]  15.77,114.05 0 top
U$132  [SERIAL_UPLOAD5]  8.99,108.97 0 top
U$133  [VCC0]  77.98,101.35 90 top
U$134  [GND1]  84.84,112.39 90 bottom
U$135  [MISO5]  92.46,111.76 90 bottom
U$136  [MOSI4]  95,111.76 90 bottom
U$137  [RST2]  87.38,112.78 90 bottom
U$138  [SCK3]  89.92,112.78 90 bottom
U$139  [VCC0]  82.3,112.52 90 bottom
U$140  [PI0]  91.44,108.46 0 bottom
U$141  [AVR1]  92.33,106.55 0 bottom
U$142  [PROGRAMMER2]  96.14,104.65 0 bottom
U$143  [HAT3]  92.2,102.74 0 bottom
U$144  [ADAPTER4]  94.61,100.71 0 bottom
U$145  [SPARKFUN_PI_AVR_PROGRAMMER_HAT0]  112.39,162.94 0 top
U$146  [PROJECT_NAME0]  97.41,158.24 0 top
U$147  [VERSION_#_DATE_#_ETC#0]  97.44,141.44 0 top
U$148  [TARGET_LOGIC_SELECT4]  152.46,159.2 0 top
U$149  [POWER0]  124.33,149.61 0 top
U$150  [STAT1]  126.57,145.82 0 top
U$151  [SHUTDOWN2]  134.49,90.86 0 top
U$152  [RASPI3]  137.34,88.6 0 top
U$153  [3#3V_#PI#7]  155.27,153.42 0 top
U$154  [5V_#PI#8]  156.9,150.85 0 top
U$155  [TARGET0]  155.37,155.93 0 top
U$156  [MISO1]  157.73,101.35 90 top
U$157  [MOSI0]  155.19,101.35 90 top
U$158  [SCK2]  160.27,101.35 90 top
U$159  [RST3]  162.81,101.35 90 top
U$160  [GND4]  165.35,101.35 90 top
U$161  [TAP0]  102.08,99.92 0 top
U$162  [TO1]  102.87,96.44 0 top
U$163  [PROGRAM2]  97.79,92.94 0 top
U$164  [SUCCESS0]  120.78,126.82 0 top
U$165  [FUSE_BITS2]  106.05,124.18 0 top
U$166  [FLASH_HEX3]  104.57,119.13 0 top
U$167  [LOCK_BITS4]  105.69,114.05 0 top
U$168  [SERIAL_UPLOAD5]  98.91,108.97 0 top
U$169  [VCC0]  167.89,101.35 90 top
U$170  [GND1]  174.75,112.39 90 bottom
U$171  [MISO5]  182.37,111.76 90 bottom
U$172  [MOSI4]  184.91,111.76 90 bottom
U$173  [RST2]  177.29,112.78 90 bottom
U$174  [SCK3]  179.83,112.78 90 bottom
U$175  [VCC0]  172.21,112.52 90 bottom
U$176  [PI0]  181.36,108.46 0 bottom
U$177  [AVR1]  182.25,106.55 0 bottom
U$178  [PROGRAMMER2]  186.06,104.65 0 bottom
U$179  [HAT3]  182.12,102.74 0 bottom
U$180  [ADAPTER4]  184.53,100.71 0 bottom
U$181  [SPARKFUN_PI_AVR_PROGRAMMER_HAT0]  202.31,162.94 0 top
U$182  [PROJECT_NAME0]  187.32,158.24 0 top
U$183  [VERSION_#_DATE_#_ETC#0]  187.36,141.44 0 top
U$184  [TARGET_LOGIC_SELECT4]  242.38,159.2 0 top
U$185  [POWER0]  214.25,149.61 0 top
U$186  [STAT1]  216.48,145.82 0 top
U$187  [SHUTDOWN2]  224.41,90.86 0 top
U$188  [RASPI3]  227.25,88.6 0 top
U$189  [3#3V_#PI#7]  245.19,153.42 0 top
U$190  [5V_#PI#8]  246.81,150.85 0 top
U$191  [TARGET0]  245.29,155.93 0 top
U$192  [MISO1]  247.65,101.35 90 top
U$193  [MOSI0]  245.11,101.35 90 top
U$194  [SCK2]  250.19,101.35 90 top
U$195  [RST3]  252.73,101.35 90 top
U$196  [GND4]  255.27,101.35 90 top
U$197  [TAP0]  192,99.92 0 top
U$198  [TO1]  192.79,96.44 0 top
U$199  [PROGRAM2]  187.71,92.94 0 top
U$200  [SUCCESS0]  210.69,126.82 0 top
U$201  [FUSE_BITS2]  195.96,124.18 0 top
U$202  [FLASH_HEX3]  194.49,119.13 0 top
U$203  [LOCK_BITS4]  195.61,114.05 0 top
U$204  [SERIAL_UPLOAD5]  188.82,108.97 0 top
U$205  [VCC0]  257.81,101.35 90 top
U$206  [GND1]  264.67,112.39 90 bottom
U$207  [MISO5]  272.29,111.76 90 bottom
U$208  [MOSI4]  274.83,111.76 90 bottom
U$209  [RST2]  267.21,112.78 90 bottom
U$210  [SCK3]  269.75,112.78 90 bottom
U$211  [VCC0]  262.13,112.52 90 bottom
U$212  [PI0]  271.27,108.46 0 bottom
U$213  [AVR1]  272.16,106.55 0 bottom
U$214  [PROGRAMMER2]  275.97,104.65 0 bottom
U$215  [HAT3]  272.03,102.74 0 bottom
U$216  [ADAPTER4]  274.45,100.71 0 bottom

## Library data of the parts
C1 C3 C4 C7 C8 C10 C12 C14 C15 C17 C19 C21 C22 C24 C26 C28 C29 C31 C33 C35 C36 C38 C40 C42 = SparkFun-Capacitors; PROD_ID: CAP-00810
C2 C9 C16 C23 C30 C37 = SparkFun-Capacitors; PROD_ID: CAP-00867
C5 C6 C11 C13 C18 C20 C25 C27 C32 C34 C39 C41 = SparkFun-Capacitors; PROD_ID: CAP-00811
D1 D4-D7 D9 D11 D14-D17 D19 D21 D24-D27 D29 D31 D34-D37 D39 D41 D44-D47 D49 D51 D54-D57 D59 = SparkFun-LED; PROD_ID: DIO-00862
D2 D3 D8 D10 D12 D13 D18 D20 D22 D23 D28 D30 D32 D33 D38 D40 D42 D43 D48 D50 D52 D53 D58 D60 = SparkFun-LED; PROD_ID: DIO-09912
E$1 = SparkFun-Retired
E$5 E$6 FD1-FD24 LOGO1-LOGO30 = SparkFun-Aesthetics
J1 J5 J9 J13 J17 J21 = SparkFun-Boards; PROD_ID: CONN-13502
J2 J6 J10 J14 J18 J22 = SparkFun-Connectors; PROD_ID: CONN-08971
J3 J7 J11 J15 J19 J23 = SparkFun-Connectors; PROD_ID: CONN-10140
J4 J8 J12 J16 J20 J24 = SparkFun-Connectors; PROD_ID: CONN-11415
JP1-JP18 = SparkFun-Jumpers
Q1-Q30 = SparkFun-DiscreteSemi; PROD_ID: TRANS-00830
R1-R9 R19 R20 R23-R30 R32 R41 R42 R45-R52 R54 R63 R64 R67-R74 R76 R85 R86 R89-R96 R98 R107 R108 R111-R118 R120 R129 R130 = SparkFun-Resistors; PROD_ID: RES-07856
R10-R18 R21 R22 R31 R33-R40 R43 R44 R53 R55-R62 R65 R66 R75 R77-R84 R87 R88 R97 R99-R106 R109 R110 R119 R121-R128 R131 R132 = SparkFun-Resistors; PROD_ID: RES-00824
S1-S6 = SparkFun-Electromechanical; PROD_ID: SWCH-08247
U1 U3 U5 U7 U9 U11 = SparkFun-Sensors; PROD_ID: IC-13773
U2 U4 U6 U8 U10 U12 = SparkFun-IC-Logic; PROD_ID: IC-13944
U$1 U$37 U$73 U$109 U$145 U$181 = buzzard_labels
U$2 U$38 U$74 U$110 U$146 U$182 = buzzard_labels (2)
U$3 U$39 U$75 U$111 U$147 U$183 = buzzard_labels (3)
U$4-U$8 U$40-U$44 U$76-U$80 U$112-U$116 U$148-U$152 U$184-U$188 = buzzard_labels (4)
U$9 U$10 U$12-U$16 U$45 U$46 U$48-U$52 U$81 U$82 U$84-U$88 U$117 U$118 U$120-U$124 U$153 U$154 U$156-U$160 U$189 U$190 U$192-U$196 = buzzard_labels (5)
U$11 U$47 U$83 U$119 U$155 U$191 = buzzard_labels (6)
U$17 U$27-U$31 U$62-U$67 U$98-U$103 U$134-U$139 U$170-U$175 U$206-U$211 = buzzard_labels (10)
U$18-U$20 U$53-U$55 U$89-U$91 U$125-U$127 U$161-U$163 U$197-U$199 = buzzard_labels (7)
U$21 U$61 U$97 U$133 U$169 U$205 = buzzard_labels (9)
U$22-U$26 U$56-U$60 U$92-U$96 U$128-U$132 U$164-U$168 U$200-U$204 = buzzard_labels (8)
U$32-U$36 U$68-U$72 U$104-U$108 U$140-U$144 U$176-U$180 U$212-U$216 = buzzard_labels (11)

## Nets
3.3V: C1.1 C3.1 C6.+ J1.1 J1.17 JP1.2 Q1.1 Q2.1 Q3.1 Q4.1 Q5.1 R1.2 R7.1 R10.1 R13.1 R15.1 R17.1 R22.1 U1.6 U1.7
3.3V1: C8.1 C10.1 C11.+ J5.1 J5.17 JP4.2 Q6.1 Q7.1 Q8.1 Q9.1 Q10.1 R23.2 R29.1 R33.1 R35.1 R37.1 R39.1 R44.1 U3.6 U3.7
3.3V2: C15.1 C17.1 C18.+ J9.1 J9.17 JP8.2 Q11.1 Q12.1 Q13.1 Q14.1 Q15.1 R45.2 R51.1 R55.1 R57.1 R59.1 R61.1 R66.1 U5.6 U5.7
3.3V3: C22.1 C24.1 C25.+ J13.1 J13.17 JP11.2 Q16.1 Q17.1 Q18.1 Q19.1 Q20.1 R67.2 R73.1 R77.1 R79.1 R81.1 R83.1 R88.1 U7.6 U7.7
3.3V4: C29.1 C31.1 C32.+ J17.1 J17.17 JP14.2 Q21.1 Q22.1 Q23.1 Q24.1 Q25.1 R89.2 R95.1 R99.1 R101.1 R103.1 R105.1 R110.1 U9.6 U9.7
3.3V5: C36.1 C38.1 C39.+ J21.1 J21.17 JP17.2 Q26.1 Q27.1 Q28.1 Q29.1 Q30.1 R111.2 R117.1 R121.1 R123.1 R125.1 R127.1 R132.1 U11.6 U11.7
5V: J1.2 J1.4 JP3.2
5V1: J5.2 J5.4 JP6.2
5V2: J9.2 J9.4 JP9.2
5V3: J13.2 J13.4 JP12.2
5V4: J17.2 J17.4 JP15.2
5V5: J21.2 J21.4 JP18.2
BRD_MISO: J2.2 U2.9
BRD_MISO1: J6.2 U4.9
BRD_MISO2: J10.2 U6.9
BRD_MISO3: J14.2 U8.9
BRD_MISO4: J18.2 U10.9
BRD_MISO5: J22.2 U12.9
BRD_MOSI: J2.1 U2.10
BRD_MOSI1: J6.1 U4.10
BRD_MOSI2: J10.1 U6.10
BRD_MOSI3: J14.1 U8.10
BRD_MOSI4: J18.1 U10.10
BRD_MOSI5: J22.1 U12.10
BRD_RST: J2.4 U2.3
BRD_RST1: J6.4 U4.3
BRD_RST2: J10.4 U6.3
BRD_RST3: J14.4 U8.3
BRD_RST4: J18.4 U10.3
BRD_RST5: J22.4 U12.3
BRD_SCK: J2.3 U2.2
BRD_SCK1: J6.3 U4.2
BRD_SCK2: J10.3 U6.2
BRD_SCK3: J14.3 U8.2
BRD_SCK4: J18.3 U10.2
BRD_SCK5: J22.3 U12.2
CAPSENSE: J1.33 U1.5
CAPSENSE1: J5.33 U3.5
CAPSENSE2: J9.33 U5.5
CAPSENSE3: J13.33 U7.5
CAPSENSE4: J17.33 U9.5
CAPSENSE5: J21.33 U11.5
CE0: J1.24
CE1: J1.26
CE2: J5.24
CE3: J5.26
CE4: J9.24
CE5: J9.26
CE6: J13.24
CE7: J13.26
CE8: J17.24
CE9: J17.26
CE10: J21.24
CE11: J21.26
FLASH_HEX_FAIL: J1.11 R2.2
FLASH_HEX_FAIL1: J5.11 R24.2
FLASH_HEX_FAIL2: J9.11 R46.2
FLASH_HEX_FAIL3: J13.11 R68.2
FLASH_HEX_FAIL4: J17.11 R90.2
FLASH_HEX_FAIL5: J21.11 R112.2
FLASH_HEX_PASS: J1.31 R6.2
FLASH_HEX_PASS1: J5.31 R28.2
FLASH_HEX_PASS2: J9.31 R50.2
FLASH_HEX_PASS3: J13.31 R72.2
FLASH_HEX_PASS4: J17.31 R94.2
FLASH_HEX_PASS5: J21.31 R116.2
FUSE_BITS_FAIL: J1.13 R3.2
FUSE_BITS_FAIL1: J5.13 R25.2
FUSE_BITS_FAIL2: J9.13 R47.2
FUSE_BITS_FAIL3: J13.13 R69.2
FUSE_BITS_FAIL4: J17.13 R91.2
FUSE_BITS_FAIL5: J21.13 R113.2
FUSE_BITS_PASS: J1.15 R4.2
FUSE_BITS_PASS1: J5.15 R26.2
FUSE_BITS_PASS2: J9.15 R48.2
FUSE_BITS_PASS3: J13.15 R70.2
FUSE_BITS_PASS4: J17.15 R92.2
FUSE_BITS_PASS5: J21.15 R114.2
GND: C1.2 C3.2 C4.2 C5.- C6.- C7.2 D1.C D2.C D3.C D4.C D5.C D6.C D7.C D8.C D9.C D10.C J1.6 J1.9 J1.14 J1.20 J1.25 J1.30 J1.34 J1.39 J2.5 S1.3 U1.4 U2.7
GND1: C8.2 C10.2 C11.- C12.2 C13.- C14.2 D11.C D12.C D13.C D14.C D15.C D16.C D17.C D18.C D19.C D20.C J5.6 J5.9 J5.14 J5.20 J5.25 J5.30 J5.34 J5.39 J6.5 S2.3 U3.4 U4.7
GND2: C15.2 C17.2 C18.- C19.2 C20.- C21.2 D21.C D22.C D23.C D24.C D25.C D26.C D27.C D28.C D29.C D30.C J9.6 J9.9 J9.14 J9.20 J9.25 J9.30 J9.34 J9.39 J10.5 S3.3 U5.4 U6.7
GND3: C22.2 C24.2 C25.- C26.2 C27.- C28.2 D31.C D32.C D33.C D34.C D35.C D36.C D37.C D38.C D39.C D40.C J13.6 J13.9 J13.14 J13.20 J13.25 J13.30 J13.34 J13.39 J14.5 S4.3 U7.4 U8.7
GND4: C29.2 C31.2 C32.- C33.2 C34.- C35.2 D41.C D42.C D43.C D44.C D45.C D46.C D47.C D48.C D49.C D50.C J17.6 J17.9 J17.14 J17.20 J17.25 J17.30 J17.34 J17.39 J18.5 S5.3 U9.4 U10.7
GND5: C36.2 C38.2 C39.- C40.2 C41.- C42.2 D51.C D52.C D53.C D54.C D55.C D56.C D57.C D58.C D59.C D60.C J21.6 J21.9 J21.14 J21.20 J21.25 J21.30 J21.34 J21.39 J22.5 S6.3 U11.4 U12.7
GND_C: J3.5 J4.5
GND_C1: J7.5 J8.5
GND_C2: J11.5 J12.5
GND_C3: J15.5 J16.5
GND_C4: J19.5 J20.5
GND_C5: J23.5 J24.5
GP1: J5.38
GP2: J5.40
GP3: J9.38
GP4: J9.40
GP5: J13.38
GP6: J13.40
GP7: J17.38
GP8: J17.40
GP9: J21.38
GP10: J21.40
GP20: J1.38
GP21: J1.40
ID_SC: J1.28
ID_SC1: J5.28
ID_SC2: J9.28
ID_SC3: J13.28
ID_SC4: J17.28
ID_SC5: J21.28
ID_SD: J1.27
ID_SD1: J5.27
ID_SD2: J9.27
ID_SD3: J13.27
ID_SD4: J17.27
ID_SD5: J21.27
LOCK_BITS_FAIL: J1.22 R9.2
LOCK_BITS_FAIL1: J5.22 R32.2
LOCK_BITS_FAIL2: J9.22 R54.2
LOCK_BITS_FAIL3: J13.22 R76.2
LOCK_BITS_FAIL4: J17.22 R98.2
LOCK_BITS_FAIL5: J21.22 R120.2
LOCK_BITS_PASS: J1.32 R8.2
LOCK_BITS_PASS1: J5.32 R30.2
LOCK_BITS_PASS2: J9.32 R52.2
LOCK_BITS_PASS3: J13.32 R74.2
LOCK_BITS_PASS4: J17.32 R96.2
LOCK_BITS_PASS5: J21.32 R118.2
MISO: J1.21 Q3.2 R15.2
MISO1: J5.21 Q8.2 R37.2
MISO2: J9.21 Q13.2 R59.2
MISO3: J13.21 Q18.2 R81.2
MISO4: J17.21 Q23.2 R103.2
MISO5: J21.21 Q28.2 R125.2
MISO_C: J3.2 J4.2
MISO_C1: J7.2 J8.2
MISO_C2: J11.2 J12.2
MISO_C3: J15.2 J16.2
MISO_C4: J19.2 J20.2
MISO_C5: J23.2 J24.2
MISO_T: Q3.3 R16.2 U2.8
MISO_T1: Q8.3 R38.2 U4.8
MISO_T2: Q13.3 R60.2 U6.8
MISO_T3: Q18.3 R82.2 U8.8
MISO_T4: Q23.3 R104.2 U10.8
MISO_T5: Q28.3 R126.2 U12.8
MOSI: J1.19 Q4.2 R17.2
MOSI1: J5.19 Q9.2 R39.2
MOSI2: J9.19 Q14.2 R61.2
MOSI3: J13.19 Q19.2 R83.2
MOSI4: J17.19 Q24.2 R105.2
MOSI5: J21.19 Q29.2 R127.2
MOSI_C: J3.1 J4.3
MOSI_C1: J7.1 J8.3
MOSI_C2: J11.1 J12.3
MOSI_C3: J15.1 J16.3
MOSI_C4: J19.1 J20.3
MOSI_C5: J23.1 J24.3
MOSI_T: Q4.3 R18.2 U2.11
MOSI_T1: Q9.3 R40.2 U4.11
MOSI_T2: Q14.3 R62.2 U6.11
MOSI_T3: Q19.3 R84.2 U8.11
MOSI_T4: Q24.3 R106.2 U10.11
MOSI_T5: Q29.3 R128.2 U12.11
N$1: D6.A R6.1
N$2: D1.A R1.1
N$3: D2.A R2.1
N$4: D3.A R3.1
N$5: D7.A R8.1
N$6: D4.A R4.1
N$7: D5.A R5.1
N$8: D8.A R9.1
N$9: D11.A R23.1
N$10: C2.2 U1.8
N$11: C2.1 R11.1 U1.1
N$12: D12.A R24.1
N$13: D9.A R19.1
N$14: D10.A R20.1
N$15: D13.A R25.1
N$16: D14.A R26.1
N$17: D15.A R27.1
N$18: D16.A R28.1
N$19: D17.A R30.1
N$20: C9.2 U3.8
N$21: C9.1 R31.1 U3.1
N$22: D18.A R32.1
N$23: D19.A R41.1
N$24: D20.A R42.1
N$25: D21.A R45.1
N$26: D22.A R46.1
N$27: D23.A R47.1
N$28: D24.A R48.1
N$29: D25.A R49.1
N$30: D26.A R50.1
N$31: D27.A R52.1
N$32: C16.2 U5.8
N$33: C16.1 R53.1 U5.1
N$34: D28.A R54.1
N$35: D29.A R63.1
N$36: D30.A R64.1
N$37: D31.A R67.1
N$38: D32.A R68.1
N$39: D33.A R69.1
N$40: D34.A R70.1
N$41: D35.A R71.1
N$42: D36.A R72.1
N$43: D37.A R74.1
N$44: C23.2 U7.8
N$45: C23.1 R75.1 U7.1
N$46: D38.A R76.1
N$47: D39.A R85.1
N$48: D40.A R86.1
N$49: D41.A R89.1
N$50: D42.A R90.1
N$51: D43.A R91.1
N$52: D44.A R92.1
N$53: D45.A R93.1
N$54: D46.A R94.1
N$55: D47.A R96.1
N$56: C30.2 U9.8
N$57: C30.1 R97.1 U9.1
N$58: D48.A R98.1
N$59: D49.A R107.1
N$60: D50.A R108.1
N$61: D51.A R111.1
N$62: D52.A R112.1
N$63: D53.A R113.1
N$64: D54.A R114.1
N$65: D55.A R115.1
N$66: D56.A R116.1
N$67: D57.A R118.1
N$68: C37.2 U11.8
N$69: C37.1 R119.1 U11.1
N$70: D58.A R120.1
N$71: D59.A R129.1
N$72: D60.A R130.1
PAD: R11.2
PAD1: R31.2
PAD2: R53.2
PAD3: R75.2
PAD4: R97.2
PAD5: R119.2
PGM_CTRL: J1.36 Q5.2 R22.2
PGM_CTRL1: J5.36 Q10.2 R44.2
PGM_CTRL2: J9.36 Q15.2 R66.2
PGM_CTRL3: J13.36 Q20.2 R88.2
PGM_CTRL4: J17.36 Q25.2 R110.2
PGM_CTRL5: J21.36 Q30.2 R132.2
PGM_CTRL_T: Q5.3 R21.2 U2.5 U2.6 U2.12 U2.13
PGM_CTRL_T1: Q10.3 R43.2 U4.5 U4.6 U4.12 U4.13
PGM_CTRL_T2: Q15.3 R65.2 U6.5 U6.6 U6.12 U6.13
PGM_CTRL_T3: Q20.3 R87.2 U8.5 U8.6 U8.12 U8.13
PGM_CTRL_T4: Q25.3 R109.2 U10.5 U10.6 U10.12 U10.13
PGM_CTRL_T5: Q30.3 R131.2 U12.5 U12.6 U12.12 U12.13
RST: J1.37 Q2.2 R10.2
RST1: J5.37 Q6.2 R33.2
RST2: J9.37 Q11.2 R55.2
RST3: J13.37 Q16.2 R77.2
RST4: J17.37 Q21.2 R99.2
RST5: J21.37 Q26.2 R121.2
RST_C: J3.4 J4.6
RST_C1: J7.4 J8.6
RST_C2: J11.4 J12.6
RST_C3: J15.4 J16.6
RST_C4: J19.4 J20.6
RST_C5: J23.4 J24.6
RST_T: Q2.3 R12.2 U2.4
RST_T1: Q6.3 R34.2 U4.4
RST_T2: Q11.3 R56.2 U6.4
RST_T3: Q16.3 R78.2 U8.4
RST_T4: Q21.3 R100.2 U10.4
RST_T5: Q26.3 R122.2 U12.4
RXI: J1.10
RXI1: J5.10
RXI2: J9.10
RXI3: J13.10
RXI4: J17.10
RXI5: J21.10
SCK: J1.23 Q1.2 R13.2
SCK1: J5.23 Q7.2 R35.2
SCK2: J9.23 Q12.2 R57.2
SCK3: J13.23 Q17.2 R79.2
SCK4: J17.23 Q22.2 R101.2
SCK5: J21.23 Q27.2 R123.2
SCK_C: J3.3 J4.4
SCK_C1: J7.3 J8.4
SCK_C2: J11.3 J12.4
SCK_C3: J15.3 J16.4
SCK_C4: J19.3 J20.4
SCK_C5: J23.3 J24.4
SCK_T: Q1.3 R14.2 U2.1
SCK_T1: Q7.3 R36.2 U4.1
SCK_T2: Q12.3 R58.2 U6.1
SCK_T3: Q17.3 R80.2 U8.1
SCK_T4: Q22.3 R102.2 U10.1
SCK_T5: Q27.3 R124.2 U12.1
SCL: J1.5
SCL1: J5.5
SCL2: J9.5
SCL3: J13.5
SCL4: J17.5
SCL5: J21.5
SCRIPT: J1.7 R5.2
SCRIPT1: J5.7 R27.2
SCRIPT2: J9.7 R49.2
SCRIPT3: J13.7 R71.2
SCRIPT4: J17.7 R93.2
SCRIPT5: J21.7 R115.2
SDA: J1.3
SDA1: J5.3
SDA2: J9.3
SDA3: J13.3
SDA4: J17.3
SDA5: J21.3
SERIAL_UPLOAD_FAIL: J1.18 R20.2
SERIAL_UPLOAD_FAIL1: J5.18 R42.2
SERIAL_UPLOAD_FAIL2: J9.18 R64.2
SERIAL_UPLOAD_FAIL3: J13.18 R86.2
SERIAL_UPLOAD_FAIL4: J17.18 R108.2
SERIAL_UPLOAD_FAIL5: J21.18 R130.2
SERIAL_UPLOAD_PASS: J1.16 R19.2
SERIAL_UPLOAD_PASS1: J5.16 R41.2
SERIAL_UPLOAD_PASS2: J9.16 R63.2
SERIAL_UPLOAD_PASS3: J13.16 R85.2
SERIAL_UPLOAD_PASS4: J17.16 R107.2
SERIAL_UPLOAD_PASS5: J21.16 R129.2
SHUTDOWN: J1.29 R7.2 S1.1
SHUTDOWN1: J5.29 R29.2 S2.1
SHUTDOWN2: J9.29 R51.2 S3.1
SHUTDOWN3: J13.29 R73.2 S4.1
SHUTDOWN4: J17.29 R95.2 S5.1
SHUTDOWN5: J21.29 R117.2 S6.1
TXO: J1.8
TXO1: J5.8
TXO2: J9.8
TXO3: J13.8
TXO4: J17.8
TXO5: J21.8
VCC_C: J3.6 J4.1
VCC_C1: J7.6 J8.1
VCC_C2: J11.6 J12.1
VCC_C3: J15.6 J16.1
VCC_C4: J19.6 J20.1
VCC_C5: J23.6 J24.1
VCC_T: J2.6 JP5.2
VCC_T1: J6.6 JP2.2
VCC_T2: J10.6 JP7.2
VCC_T3: J14.6 JP10.2
VCC_T4: J18.6 JP13.2
VCC_T5: J22.6 JP16.2
VCC_T_SELECTED: C4.1 C5.+ C7.1 JP1.1 JP3.1 JP5.1 R12.1 R14.1 R16.1 R18.1 R21.1 U2.14
VCC_T_SELECTED1: C12.1 C13.+ C14.1 JP2.1 JP4.1 JP6.1 R34.1 R36.1 R38.1 R40.1 R43.1 U4.14
VCC_T_SELECTED2: C19.1 C20.+ C21.1 JP7.1 JP8.1 JP9.1 R56.1 R58.1 R60.1 R62.1 R65.1 U6.14
VCC_T_SELECTED3: C26.1 C27.+ C28.1 JP10.1 JP11.1 JP12.1 R78.1 R80.1 R82.1 R84.1 R87.1 U8.14
VCC_T_SELECTED4: C33.1 C34.+ C35.1 JP13.1 JP14.1 JP15.1 R100.1 R102.1 R104.1 R106.1 R109.1 U10.14
VCC_T_SELECTED5: C40.1 C41.+ C42.1 JP16.1 JP17.1 JP18.1 R122.1 R124.1 R126.1 R128.1 R131.1 U12.14